# Altium PCB endpanel_lowvoltage.PcbDoc
Units mm, origin at the board's own origin, x right, y up, seen from the top; angles counter-clockwise.
Board outline 128 x 45 mm, 2 copper layers (Top Layer, Bottom Layer); 2 components, 0 nets, 0 pads, 0 vias.
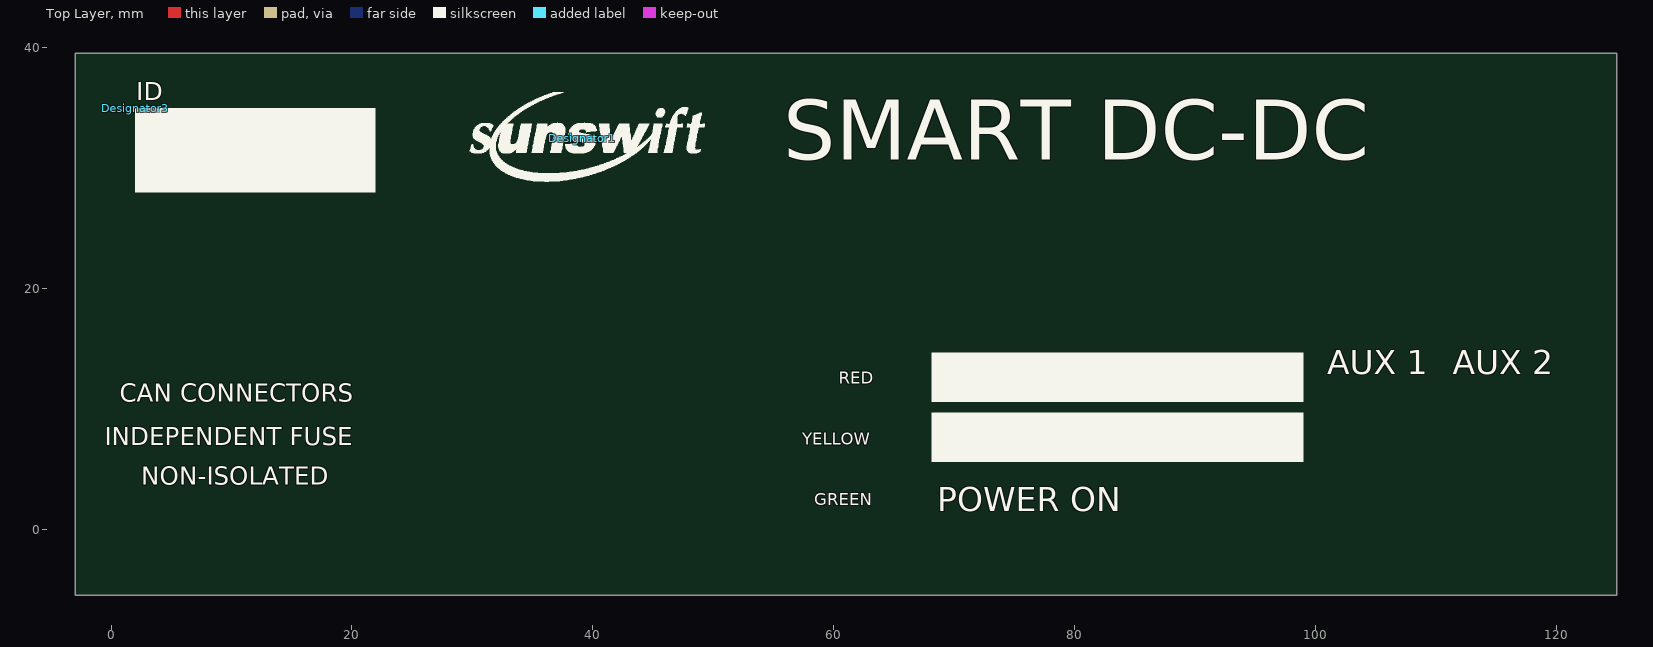
[diagram p0: Top Layer view]
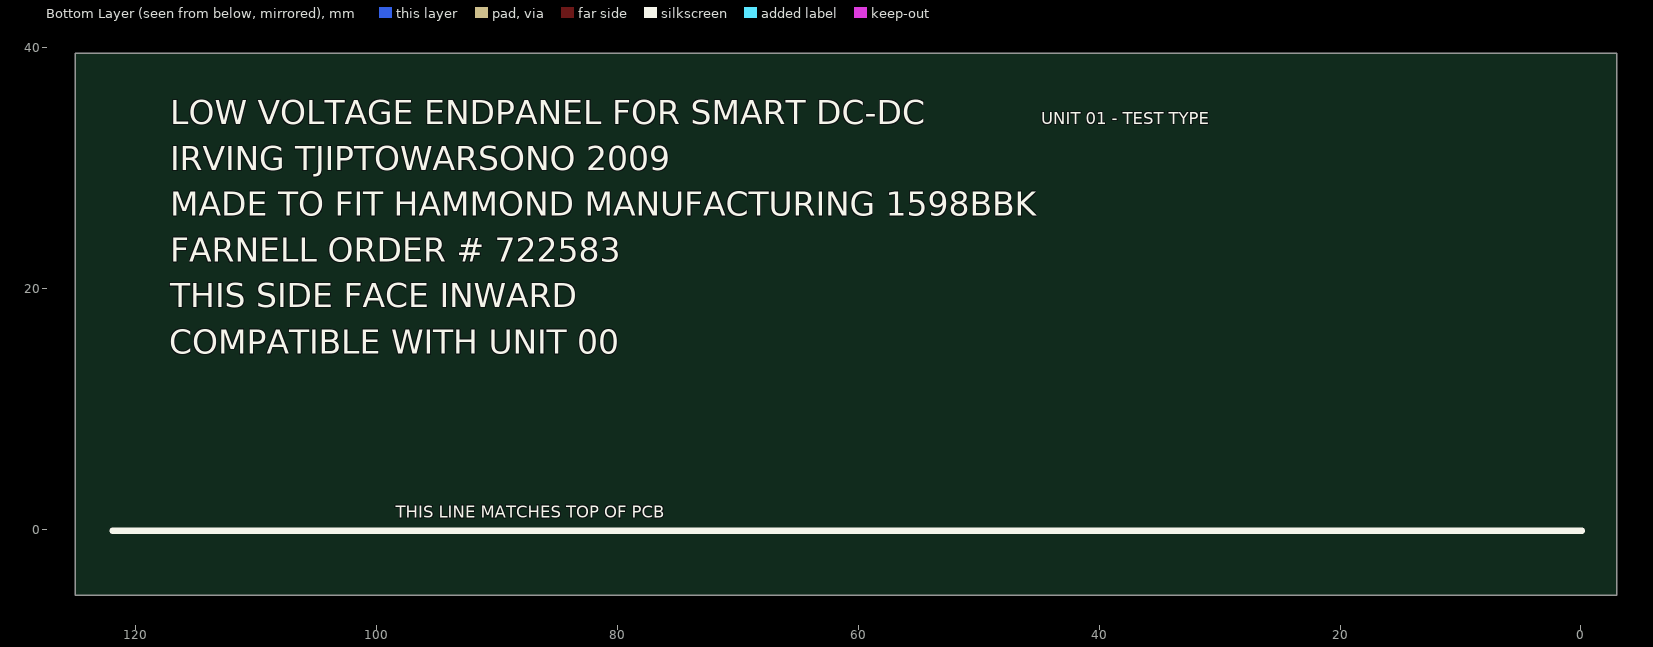
[diagram p1: Bottom Layer view, seen from below]

## Layer stack, top to bottom
Top Layer: signal copper 0.0356
Dielectric: dielectric 0.32, FR-4, Dk 4.8
Bottom Layer: signal copper 0.0356

## Board outline
-2.98,-5.45 125.02,-5.45 125.02,39.55 -2.98,39.55

## Design rules (kind name [scope] priority, off if disabled: settings)
Clearance [All] p1: gap=0.254
PolygonConnect [All] p1: connectstyle=Relief reliefconductorwidth=0.254 reliefentries=4 polygonreliefangle="90 Angle"
RoutingVias [All] p1: holewidth=0.711 width=1.27 viastyle="Through Hole" minholewidth=0.711 minwidth=1.27 maxholewidth=0.711 maxwidth=1.27
SilkscreenOverComponentPads [All] p1: minsilkscreentomaskgap=0.254
SolderMaskExpansion [All] p1: expansion=0.102
TestPointUsage [All] p1: valid=0 allowmultiple=FALSE
Testpoint [All] p1: side=15 testpointundercomponent=TRUE minsize=1.016 maxsize=2.54 preferedsize=1.524 minholesize=0 maxholesize=1.016 preferedholesize=0.813 testpointgrid=0.025 style=1023 order=0-112345678
Width [All] p1: maxlimit=0.254 minlimit=0.254 preferedwidth=0.254
23 further rules are at their usual default settings.

## Components (designator, comment, footprint, x,y, rotation, side; value= is the part's Value field where it differs from the comment)
Designator1 "Comment" SUNSWIFTLOGO 39.116,32.512 r0 top
Designator3 "Comment" IDBOX 2,35 r0 top

## Footprints (in the part's own frame and the unit in brackets; to place one, negate y for a bottom-side part, rotate by r counter-clockwise, add the part's x,y. Pads: shape width x height; smd on the part's side, far side on the other; paste and mask are expansions set on the pad)
IDBOX [mm] "Infobox"
  silkscreen extent 0,-7 19.95,0
SUNSWIFTLOGO [mm] "Sunswift Logo"
  silkscreen extent -9.32,-3.58 10.19,3.81

## Nets (pads, with @x,y where several pads share a name; then routed paths per layer and width w, separated by ;. In a path a pad name is that pad's centre, name@x,y a point inside that pad or via, vN(x,y) a via of type N, cw(c..) or ccw(c..) an arc to the next point about the centre after c; other vN are vias at no path point)

## Silkscreen, mask and mechanical layers (free items; w line width, h text height)
Top Overlay:
  rectangle: 68.1,5.6 99,9.7
  rectangle: 68.1,10.6 99,14.7
  text "SMART DC-DC" at 55.8,30.7 h5
  text "AUX 1" at 101,12.9 h2
  text "AUX 2" at 111.4,12.9 h2
  text "RED" at 60.4,12.1 h1
  text "CAN CONNECTORS" at 0.7,10.6 h1.5
  text "YELLOW" at 57.401,7.05 h1
  text "INDEPENDENT FUSE" at -0.533,7 h1.5
  text "NON-ISOLATED" at 2.5,3.7 h1.5
  text "GREEN" at 58.401,2 h1
  text "POWER ON" at 68.6,1.5 h2
Bottom Overlay:
  lines w0.508: -0.1,-0.1 121.94,-0.1
  text "UNIT 01 - TEST TYPE" at 44.8,33.65 h1
  text "LOW VOLTAGE ENDPANEL FOR SMART DC-DC" at 117.12,33.65 h2
  text "IRVING TJIPTOWARSONO 2009" at 117.12,29.85 h2
  text "MADE TO FIT HAMMOND MANUFACTURING 1598BBK" at 117.12,26.05 h2
  text "FARNELL ORDER # 722583" at 117.12,22.25 h2
  text "THIS SIDE FACE INWARD" at 117.12,18.45 h2
  text "COMPATIBLE WITH UNIT 00" at 117.2,14.6 h2
  text "THIS LINE MATCHES TOP OF PCB" at 98.4,1 h1
Mechanical 1:
  circle w0.254: c30.988,8 r6.5
  circle w0.254: c48.644,8 r6.5
  circle w0.254: c65.578,2.54 r1.6
  circle w0.254: c65.578,7.62 r1.6
  circle w0.254: c65.578,12.7 r1.6
  lines w0.254: -2.98,-5.45 125.02,-5.45 125.02,39.55 -2.98,39.55 -2.98,-5.45 ; 102.672,0 102.672,12 109.672,12 109.672,0 102.672,0 ; 112.324,0 119.324,0 119.324,12 112.324,12 112.324,0
Mechanical 16:
  lines w0.127: -78.58,-23.89 -73.5,-23.89 ; -78.58,24.37 -73.5,24.37 ; -78.58,72.63 -73.5,72.63 ; -5.555,-72.15 -5.555,-67.07 ; -5.555,115.81 -5.555,120.89 ; 67.47,-72.15 67.47,-67.07 ; 67.47,115.81 67.47,120.89 ; 94.14,-59.45 208.44,-59.45 ; 94.14,-51.83 208.44,-51.83 ; 94.14,-44.21 132.24,-44.21 ; 132.24,-67.07 132.24,-51.83 132.24,-36.59 ; 140.495,-72.15 140.495,-67.07 ; 140.495,115.81 140.495,120.89 ; 185.58,-67.07 185.58,-51.83 ; 208.44,-23.89 213.52,-23.89 ; 208.44,24.37 213.52,24.37 ; 208.44,72.63 213.52,72.63 ; 94.14,-67.07 58.58,-67.07 58.58,-36.59 94.14,-36.59 ; 94.14,-67.07 208.44,-67.07 ; 94.14,-67.07 94.14,-36.59 ; 94.14,-36.59 132.24,-36.59 ; 132.24,-36.59 208.44,-36.59 208.44,-67.07 ; 208.44,-67.07 -73.5,-67.07 -73.5,115.81 208.44,115.81 208.44,-67.07 ; -78.58,-72.15 213.52,-72.15 213.52,120.89 -78.58,120.89 -78.58,-72.15
  text "1" at -42.334,117.461 h1.78
  text "2" at 30.31,117.461 h1.78
  text "3" at 103.462,117.461 h1.78
  text "4" at 176.36,117.461 h1.78
  text "A" at -76.675,94.449 h1.78
  text "A" at 210.345,94.449 h1.78
  text "B" at -76.675,46.392 h1.78
  text "B" at 210.345,46.392 h1.78
  text "C" at -76.675,-2.122 h1.78
  text "C" at 210.345,-2.122 h1.78
  text "ENGINEER:" at 95.41,-39.13 h1.14
  text "TITLE:" at 133.51,-39.13 h1.14
  text "Name" at 97.315,-42.432 h1.78
  text "Title" at 142.527,-46.115 h5.08
  text "PCB DESIGNER:" at 95.41,-46.623 h1.14
  text "Sunswift" at 61.374,-47.004 h5.08
  text "Name" at 97.315,-49.925 h1.78
  text "D" at -76.675,-50.128 h1.78
  text "D" at 210.345,-50.128 h1.78
  text "DATE:" at 95.41,-54.37 h1.14
  text "PART NO.:" at 133.51,-54.37 h1.14
  text "REV:" at 186.85,-54.37 h1.14
  text "Room 109" at 62.39,-56.91 h1.78
  text "Number" at 143.289,-57.291 h1.78
  text ".PRINT_DATE" at 96.68,-57.418 h1.78
  text "Rev" at 191.168,-57.545 h1.78
  text "EE Building" at 62.39,-59.45 h1.78
  text "UNSW, Sydney Australia" at 62.39,-61.99 h1.78
  text "FILE NAME:" at 95.41,-61.99 h1.14
  text "DWG NO:" at 133.51,-61.99 h1.14
  text "SCALE:" at 186.85,-61.99 h1.14
  text "2052" at 62.39,-64.53 h1.78
  text "Number" at 143.924,-64.53 h1.78
  text "Scale" at 192.311,-64.657 h1.78
  text ".PCB_FILE_NAME_NO_PATH" at 96.68,-65.038 h1.78
  text "1" at -42.334,-70.499 h1.78
  text "2" at 30.31,-70.499 h1.78
  text "3" at 103.462,-70.499 h1.78
  text "4" at 176.36,-70.499 h1.78

## Text inside footprints (layer, text, board x,y; h text height)
Designator3: Top Overlay "ID" at 2.1,35.65 h1.52